# Altium PCB PCB1.PcbDoc
Units mil, origin at the board's own origin, x right, y up, seen from the top; angles counter-clockwise.
Board outline 6000 x 4000 mil, 2 copper layers (Top Layer, Bottom Layer); 3 components, 3 nets, 17 pads, 0 vias.
Unrouted connection lines stored in the file: 3.
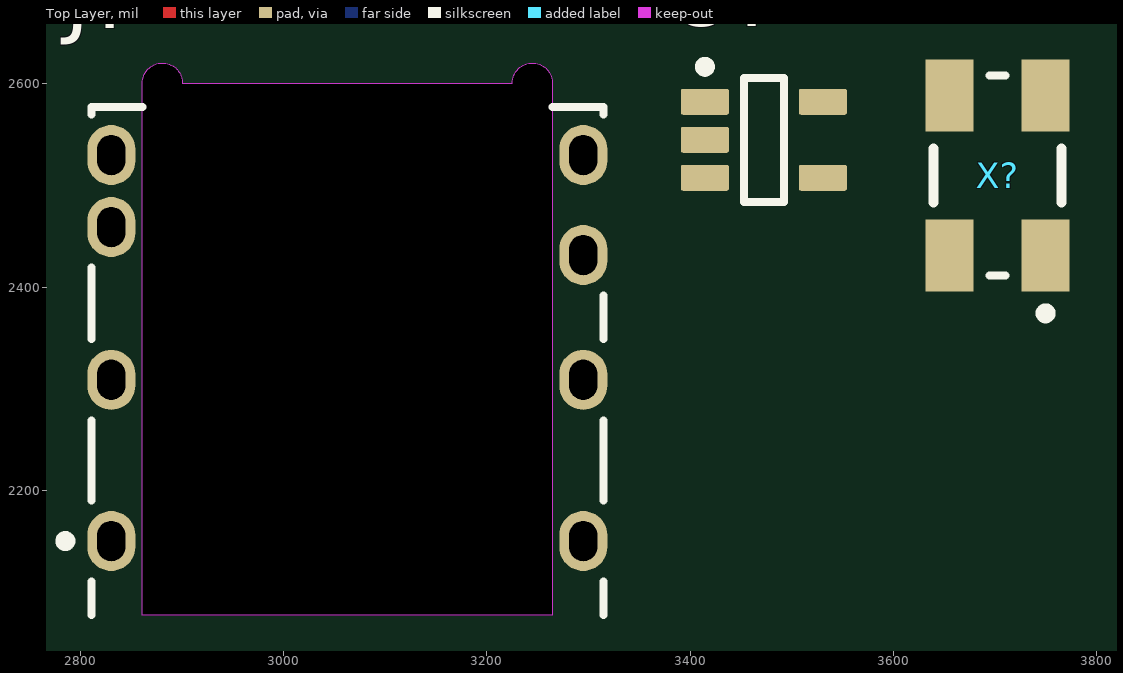
[diagram p0: Top Layer view]
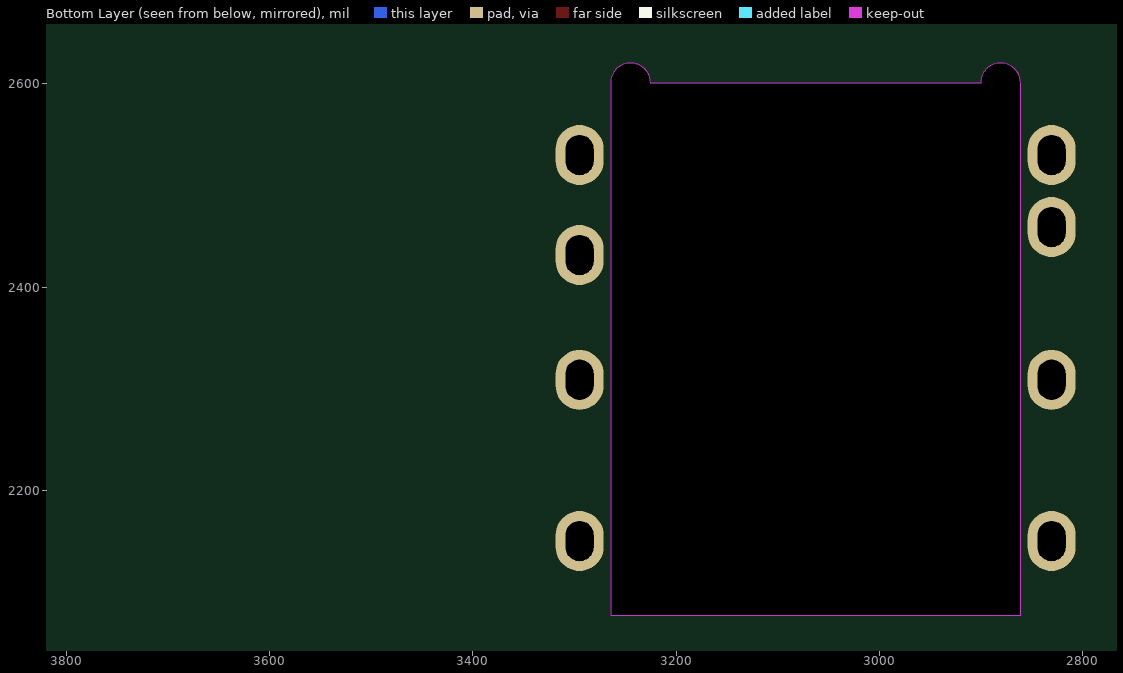
[diagram p1: Bottom Layer view, seen from below]

## Layer stack, top to bottom
Top Solder: solder mask 0.4, Solder Resist, Dk 3.5
Top Layer: signal copper 1.4
Dielectric 1: dielectric 12.6, FR-4, Dk 4.8
Bottom Layer: signal copper 1.4
Bottom Solder: solder mask 0.4, Solder Resist, Dk 3.5

## Board outline
1000,1000 7000,1000 7000,5000 1000,5000

## Design rules (kind name [scope] priority, off if disabled: settings)
Clearance [All] p1: gap=10 ignorepadtopadclearanceinfootprint=FALSE except(0: Arc-Hole Track-Hole SMDPad-Hole THPad-Hole Via-Hole Fill-Hole Poly-Hole Region-Hole Text-Hole)
PolygonConnect [All] p1: connectstyle=Relief reliefconductorwidth=10 reliefentries=4 polygonreliefangle="90 Angle" airgapwidth=10
RoomDefinition Sheet1 [InComponentClass('Sheet1')] p1: confinementstyle=ConfineIn formatcopy=TRUE lockcomponents=FALSE outline 2767.72,1960.04 3787.72,1960.04 3787.72,2735.04 2767.72,2735.04
RoutingVias [All] p1: holewidth=28 width=50 viastyle="Through Hole" minholewidth=28 minwidth=50 maxholewidth=28 maxwidth=50
SolderMaskExpansion [All] p1: expansion=4 istentingtop=FALSE
Width [All] p1: maxlimit=10 minlimit=10 preferedwidth=10
30 further rules are at their usual default settings.

## Components (designator, comment, footprint, x,y, rotation, side; value= is the part's Value field where it differs from the comment)
J? "SJ-3506-SMT-TR" CUI-SJ-3506-SMT-TR_V 3062.72,2340.04 r90 top
U? "OPA336N/250" DBV0005A_M 3472.72,2545.04 r0 top
X? "ABM3B-8.000MHZ-B2-T" ABRA-ABM3B_V 3702.72,2510.04 r90 top

## Footprints (in the part's own frame and the unit in brackets; to place one, negate y for a bottom-side part, rotate by r counter-clockwise, add the part's x,y. Pads: shape width x height; smd on the part's side, far side on the other; paste and mask are expansions set on the pad)
ABRA-ABM3B_V [mm] "SMD, 4-Leads, Body 5x3.2mm"
  rect 1.8x1.2 smd: 1(-2,-1.2) 2(2,-1.2) 3(2,1.2) 4(-2,1.2)
  silkscreen extent -3.57,-1.6 2.5,1.6, body extent -2.5,-1.59 2.5,1.59, height 1.13
CUI-SJ-3506-SMT-TR_V [mm] "Jack, 6-Leads, Body 15.4x12.8mm"
  oval 1.5x1.2 hole 0.7 slot 1 at 0 deg unplated paste-1: 1(-4.825,5.9) 2(3.025,5.9) 3(4.825,-5.9) 4(2.325,-5.9) 5(-4.825,-5.9) 6(4.825,5.9) 7(-0.795,5.9) 8(-0.795,-5.9)
  Keep-Out Layer board cut-out: -6.675,5.125 6.625,5.125 6.671,5.123 6.716,5.117 6.76,5.106 6.803,5.092 6.846,5.074 6.886,5.052 6.924,5.026 6.959,4.997 6.98,4.977 6.999,4.957 7.034,4.913 7.062,4.867 7.085,4.821 7.103,4.773 7.115,4.724 7.123,4.675 7.125,4.625 7.123,4.581 7.117,4.537 7.107,4.493 7.094,4.45 7.076,4.408 7.054,4.369 7.042,4.349 7.029,4.33 7.001,4.295 6.983,4.276 6.964,4.258 6.944,4.24 6.923,4.224 6.902,4.209 6.88,4.195 6.833,4.17 6.808,4.16 6.783,4.15 6.757,4.143 6.731,4.136 6.705,4.131 6.678,4.128 6.652,4.126 6.625,4.125 6.625,-4.125 6.65,-4.126 6.674,-4.127 6.723,-4.135 6.772,-4.147 6.817,-4.163 6.863,-4.185 6.907,-4.212 6.947,-4.242 6.983,-4.275 7.017,-4.314 7.046,-4.355 7.071,-4.398 7.081,-4.421 7.091,-4.443 7.099,-4.465 7.106,-4.488 7.117,-4.534 7.123,-4.581 7.125,-4.625 7.123,-4.671 7.117,-4.717 7.106,-4.762 7.092,-4.805 7.072,-4.849 7.06,-4.871 7.047,-4.892 7.034,-4.912 7.02,-4.932 6.989,-4.968 6.971,-4.986 6.952,-5.004 6.933,-5.019 6.912,-5.035 6.891,-5.049 6.869,-5.061 6.847,-5.073 6.824,-5.084 6.801,-5.093 6.777,-5.101 6.752,-5.109 6.727,-5.115 6.702,-5.119 6.677,-5.122 6.651,-5.124 6.625,-5.125 -6.675,-5.125
  silkscreen extent -6.67,-6.4 6.03,7.17, body extent -9.37,-6.4 6.03,6.4, height 3.26
DBV0005A_M [mm] "SOT23, 5-Leads, Body 3.05x1.75mm, Pitch 0.95mm, IPC Low Density"
  rrect15% 1.2x0.65 smd: 1(-1.475,0.95) 2(-1.475,0) 3(-1.475,-0.95) 4(1.475,-0.95) 5(1.475,0.95)
  silkscreen extent -1.6,-1.55 0.5,1.95, body extent -1.42,-1.46 1.42,1.46, height 1.08

## Part data
J?: library part CMP-002-00010-2, "Female Mid Mount Audio Jack, 6 Position, Height 2.55 mm, Tail Length 2 mm, -25 to 85 degC, RoHS, Tape and Reel", Current Rating=1A, Manufacturer="CUI Inc", Max Operating Temperature=85°C, Min Operating Temperature=-25°C, Package Description="Female Mid Mount Audio Jack, 6 Position, Height 2.55 mm, Tail Length 2 mm", Package Quantity=500, Case/Package=SJ-3506-SMT-TR, Connector Type=Audio, Contact Material=Brass, Datasheet URL=http://www.cui.com/product/resource/sj-3506-smt.pdf, Datasheet Version="Rev. 1.01, 11/2012", Gender=Female, Housing Material=Plastic, Manufacturer URL=http://www.cui.com/, Mounting Technology=TH, Package Reference=SJ-3506-SMT-TR, Packaging=TapeandReel, RoHS Compliant=True, Shielding=Shielded
U?: library part CMP-014-00020-2, "Single-Supply, MicroPower CMOS Operational Amplifier, 2.3 to 5.5 V, -55 to 125 degC, 5-Pin SOT23 (DBV5), Green (RoHS & no Sb/Br), Tape and Reel", Case/Package=SOT-23-5, Manufacturer="Texas Instruments (TI)", Max I/O Voltage=125uV, Max Operating Temperature=85°C, Max Supply Voltage=5V, Min Operating Temperature=-40°C, Min Supply Voltage=3V, Nominal Supply Current=32uA, Nominal Voltage Gain=115dB, Package Description="5-Pin Small Outline Transistor, Body 2.9 x 1.6 mm, Pitch 0.95 mm", Package Quantity=250, Package Reference=DBV0005A, Channels=1, Common Mode Rejection Ratio=80dB, Datasheet URL=http://www.ti.com/general/docs/lit/getliterature.tsp?genericPartNumber=OPA336&fileType=pdf, Datasheet Version="SBOS068C, 01/2005", Manufacturer URL=http://www.ti.com/, Mounting Technology=SM, Nominal Gain Bandwith Product=11MHz, Package URL=http://www.ti.com/lit/ml/mpds018l/mpds018l.pdf, Packaging=TapeandReel, Pins=5, RoHS Compliant=True, Slew Rate=0.03V/us, Unity Gain Bandwidth Product=100KHz
X?: library part CMP-003-00021-2, "Ceramic SMD Crystal, 8 MHz, +/- 20 ppm, 18 pF, -20 to 70 degC, 4-Pin SMD, RoHS, Tape and Reel", Case/Package=CSMD, Frequency=8MHz, Frequency Tolerance=20ppm, Load Capacitance=18pF, Manufacturer=Abracon, Max Operating Temperature=70°C, Min Operating Temperature=-20°C, Package Description="4-Pin Surface Mount Device, Body 5 x 3.2 mm", Package Quantity=1000, Package Reference=ABM3B, Resistance=200Ohm, Datasheet URL=http://www.abracon.com/Resonators/abm3b.pdf, Datasheet Version=Aug-15, ESR=200, Manufacturer URL=http://www.abracon.com/, Mounting Technology=SM, Packaging=TapeandReel, Pins=4, RoHS Compliant=True, Tolerance=20ppm

## Nets (pads, with @x,y where several pads share a name; then routed paths per layer and width w, separated by ;. In a path a pad name is that pad's centre, name@x,y a point inside that pad or via, vN(x,y) a via of type N, cw(c..) or ccw(c..) an arc to the next point about the centre after c; other vN are vias at no path point)
NetJ?_2: J?.2 X?.2
NetJ?_7: J?.7 U?.3
NetU?_4: U?.4 X?.4
pads on no net: J?.1 J?.3 J?.4 J?.5 J?.6 J?.8 U?.1 U?.2 U?.5 X?.1 X?.3